# EAGLE board R2P_Sonar_module_mcu_only (EAGLE 6.2)
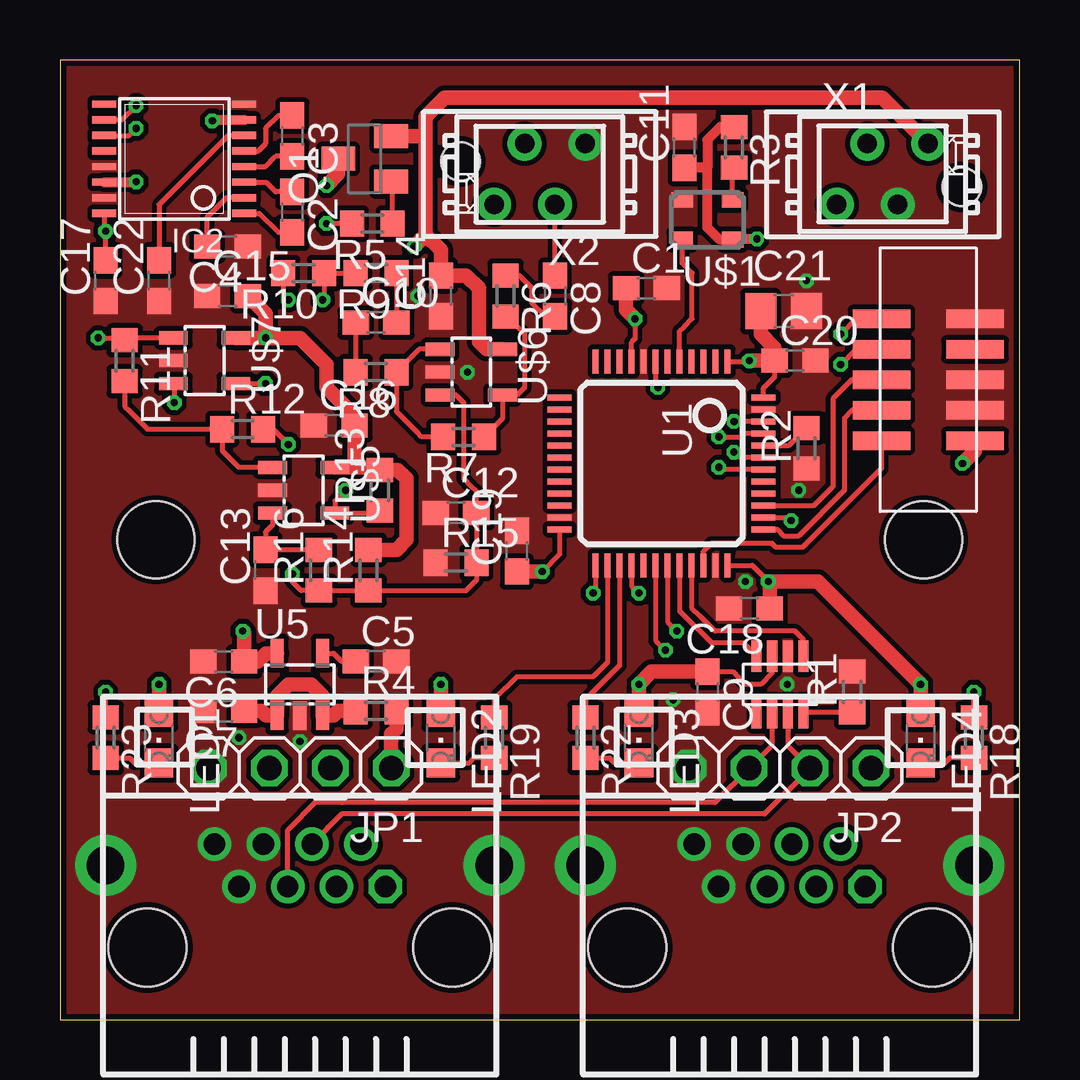
[diagram p0: board, top side]
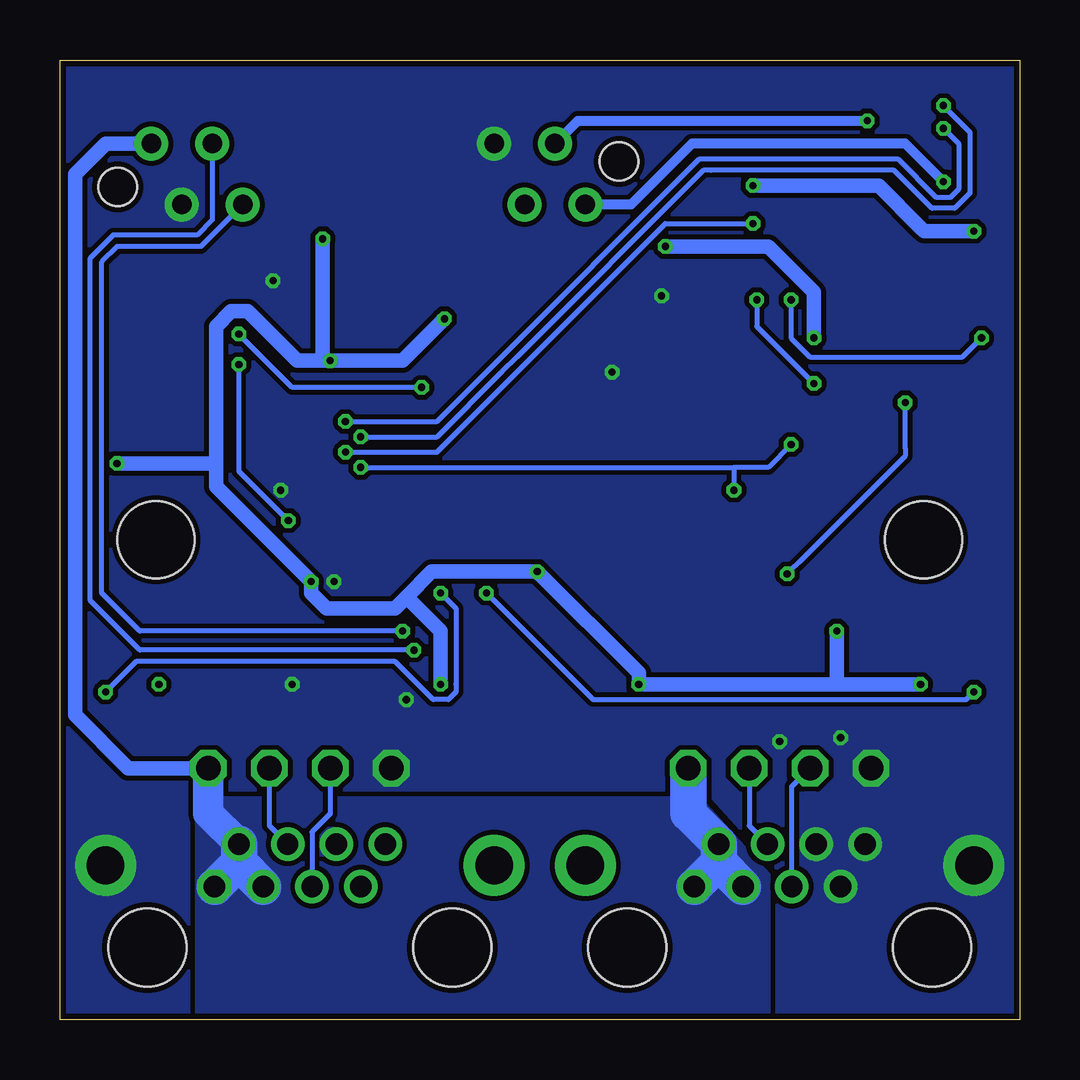
[diagram p1: board, bottom side, seen from below]

Size 40 x 40 mm. Coordinates in mm from the lower left corner, seen from the top.
Outline: 0,0 40,0 40,40 0,40 0,0
Copper layers (1*16): Top 0.035mm / dielectric 1.5mm / Bottom 0.035mm
Design rules: minimum track width 8mil, minimum drill 0.3mm, track to track 8mil, track to pad 8mil, pad to pad 8mil, via to via 8mil, smd to smd 0mil, copper to edge 10mil, drill to drill 10mil, minimum pad ring 10mil, minimum via ring 6mil, stop-mask expansion 2mil, vias tented up to drill 100mil, thermal gap 10mil
Holes 3.2 mm at 4,20 36,20

## Footprints (pad centres in the part's own frame; a part is rotated, then mirrored left to right if it is on the bottom)
0438600010 = drill 0.889 octagon: P$1 3.556,2.54 | drill 0.889: P$2 2.54,4.318; P$3 1.524,2.54; P$4 0.508,4.318; P$5 -0.508,2.54; P$6 -1.524,4.318; P$7 -2.54,2.54; P$8 -3.556,4.318 | drill 1.575 pad 2.54: P$9 8.103,3.429; P$10 -8.103,3.429 | hole 3.251: -6.35,0; 6.35,0
C0603 = smd 1.1 x 1: 1 -0.85,0; 2 0.85,0
C0805 = smd 1.3 x 1.5: 1 -0.95,0; 2 0.95,0
TSSOP16 = smd 0.305 x 0.991: 1 -2.275,-2.918; 2 -1.625,-2.918; 3 -0.975,-2.918; 4 -0.325,-2.918; 5 0.325,-2.918; 6 0.975,-2.918; 7 1.625,-2.918; 8 2.275,-2.918; 9 2.275,2.918; 10 1.625,2.918; 11 0.975,2.918; 12 0.325,2.918; 13 -0.325,2.918; 14 -0.975,2.918; 15 -1.625,2.918; 16 -2.275,2.918
1X04 = drill 1.016 octagon: 1 -3.81,0; 2 -1.27,0; 3 1.27,0; 4 3.81,0
CHIPLED_0805 = smd 1.2 x 1.2: A 0,-1.05; C 0,1.05
SOT23-BEC = smd 1 x 1.4: B -0.95,-1.1; C 0,1.1; E 0.95,-1.1
R0603 = smd 1 x 1.1: 1 -0.85,0; 2 0.85,0
SOT23-8L = smd 1.3 x 0.42: P$1 -1.175,1.3; P$2 -1.175,0.65; P$3 -1.175,0; P$4 -1.175,-0.65; P$5 1.175,-0.65; P$6 1.175,0; P$7 1.175,0.65; P$8 1.175,1.3
LQFP48 = smd 1 x 0.25: 1 -4.25,2.75; 2 -4.25,2.25; 3 -4.25,1.75; 4 -4.25,1.25; 5 -4.25,0.75; 6 -4.25,0.25; 7 -4.25,-0.25; 8 -4.25,-0.75; 9 -4.25,-1.25; 10 -4.25,-1.75; 11 -4.25,-2.25; 12 -4.25,-2.75; 25 4.25,-2.75; 26 4.25,-2.25; 27 4.25,-1.75; 28 4.25,-1.25; 29 4.25,-0.75; 30 4.25,-0.25; 31 4.25,0.25; 32 4.25,0.75; 33 4.25,1.25; 34 4.25,1.75; 35 4.25,2.25; 36 4.25,2.75 | smd 0.25 x 1: 13 -2.75,-4.25; 14 -2.25,-4.25; 15 -1.75,-4.25; 16 -1.25,-4.25; 17 -0.75,-4.25; 18 -0.25,-4.25; 19 0.25,-4.25; 20 0.75,-4.25; 21 1.25,-4.25; 22 1.75,-4.25; 23 2.25,-4.25; 24 2.75,-4.25; 37 2.75,4.25; 38 2.25,4.25; 39 1.75,4.25; 40 1.25,4.25; 41 0.75,4.25; 42 0.25,4.25; 43 -0.25,4.25; 44 -0.75,4.25; 45 -1.25,4.25; 46 -1.75,4.25; 47 -2.25,4.25; 48 -2.75,4.25
SOT23-5L = smd 0.55 x 1.2: 1 -0.95,-1.3; 2 0,-1.3; 3 0.95,-1.3; 4 0.95,1.3; 5 -0.95,1.3
ASE = smd 0.9 x 0.65: 1 -1.05,-0.825; 2 1.05,-0.825; 3 1.05,0.825; 4 -1.05,0.825
FTSH-105 = smd 0.76 x 2.4: P$1 -2.54,-1.95; P$2 -2.54,1.95; P$3 -1.27,-1.95; P$4 -1.27,1.95; P$5 0,-1.95; P$6 0,1.95; P$7 1.27,-1.95; P$8 1.27,1.95; P$9 2.54,-1.95; P$10 2.54,1.95
MICROMATCH-4 = drill 0.813 pad 1.422: 1 1.905,1.27; 2 0.635,-1.27; 3 -0.635,1.27; 4 -1.905,-1.27 | hole 1.6: 3.305,-0.53

## Placement (x,y rotation side)
1  RJ45-43860  [0438600010]  30,3 0 top
2  RJ45-43860  [0438600010]  10,3 0 top
C1  100n  [C0603]  24.45,30.48 0 top
C2  100n  [C0603]  9.68,33.66 270 top
C3  100n  [C0603]  9.68,36.83 270 top
C4  100n  [C0603]  6.99,32.23 180 top
C5  10n  [C0603]  13.18,14.92 0 top
C6  1u  [C0603]  6.83,14.92 180 top
C7  1u  [C0603]  6.83,12.86 180 top
C8  100n  [C0603]  20.64,30.16 270 top
C9  100n  [C0603]  26.99,13.65 270 top
C10  100n  [C0603]  13.18,29.05 0 top
C11  15pF  [C0603]  26.04,36.35 90 top
C12  100n  [C0603]  16.51,21.11 0 top
C13  100n  [C0603]  8.57,18.73 90 top
C14  100n  [C0603]  15.87,30.16 90 top
C15  100n  [C0603]  6.99,30.16 0 top
C16  100n  [C0603]  11.43,24.76 0 top
C17  100n  [C0603]  1.91,30.8 90 top
C18  100n  [C0603]  28.73,17.14 180 top
C19  100n  [C0603]  19.05,19.53 90 top
C20  100n  [C0603]  30.64,27.46 0 top
C21  4.7u  [C0805]  30.16,29.53 0 top
C22  100n  [C0603]  4.13,30.8 90 top
IC2  MAX3232CUE  [TSSOP16]  4.76,35.88 90 top
JP1  [1X04]  10,10.48 180 top
JP2  [1X04]  30,10.48 180 top
LED1  [CHIPLED_0805]  4.13,11.75 180 top
LED2  [CHIPLED_0805]  15.87,11.75 180 top
LED3  [CHIPLED_0805]  24.13,11.75 180 top
LED4  [CHIPLED_0805]  35.88,11.75 180 top
Q1  BC807-16SMD  [SOT23-BEC]  12.7,35.88 90 top
R1  0  [R0603]  33.02,13.65 90 top
R2  10k  [R0603]  31.12,23.81 90 top
R3  100k  [R0603]  28.1,36.35 270 top
R4  PTC  [R0603]  13.18,12.86 0 top
R5  10k  [R0603]  13.02,33.18 180 top
R6  2k2  [R0603]  18.57,30.16 270 top
R7  10k  [R0603]  16.83,24.29 180 top
R8  2k2  [R0603]  13.18,26.99 180 top
R9  2k2  [R0603]  13.18,31.11 180 top
R10  2k2  [R0603]  10.16,31.11 180 top
R11  2k2  [R0603]  2.7,27.46 270 top
R12  2k2  [R0603]  7.62,24.61 0 top
R13  2k2  [R0603]  13.33,22.07 90 top
R14  2k2  [R0603]  12.86,18.73 90 top
R15  2k2  [R0603]  16.51,19.05 0 top
R16  2k2  [R0603]  10.79,18.73 90 top
R18  330  [R0603]  38.1,11.75 270 top
R19  330  [R0603]  18.1,11.75 270 top
R22  330  [R0603]  21.91,11.75 270 top
R23  330  [R0603]  1.91,11.75 270 top
SOT1  MAX3051  [SOT23-8L]  29.69,13.97 270 top
U1  STM32F103CX  [LQFP48]  25.08,23.18 270 top
U5  LD3985XX  [SOT23-5L]  10,13.97 0 top
U$1  ASE  [ASE]  26.99,33.34 180 top
U$4  FTSH-105  [FTSH-105]  36.2,26.67 90 top
U$5  LMV331  [SOT23-5L]  10.16,22.07 270 top
U$6  TS461  [SOT23-5L]  17.14,26.99 270 top
U$7  TS461  [SOT23-5L]  6.03,27.46 270 top
X1  MICROMATCH-4  [MICROMATCH-4]  34.29,35.24 0 top
X2  MICROMATCH-4  [MICROMATCH-4]  20,35.24 180 top

## Library data of the parts
1 2 = molex
C1-C22 R1-R16 R18 R19 R22 R23 = rcl
IC2 = maxim; MF: MAXIM; MPN: MAX3232CUE+; OC_FARNELL: 1593350; OC_NEWARK: 68K4629
JP1 JP2 = misc
LED1-LED4 = led
Q1 = transistor-pnp
SOT1 = maxim
U1 U5 U$6 U$7 = st
U$1 = crystal; OC_FARNELL: unknown; OC_NEWARK: unknown
U$4 = samtec
U$5 = texas-instruments
X1 X2 = tyco

## Nets
!TXEN: R5.2 U1.43
+3V3: C1.1 C6.1 C9.1 C11.1 C18.1 C19.1 C20.1 C21.1 LED1.A LED2.A LED3.A LED4.A R3.1 SOT1.P$3 U1.1 U1.9 U1.24 U1.36 U1.48 U5.5 U$1.4 U$4.P$1
+5V: 1.P$1 1.P$2 1.P$3 2.P$1 2.P$2 2.P$3 C14.2 C15.2 C16.2 JP1.1 JP2.1 Q1.E R4.2 R13.2 R14.2 U$5.5 U$6.5 U$7.5 X1.1
BOOT0: R2.2 U1.44
CAN_RX: SOT1.P$4 U1.32
CAN_TX: SOT1.P$1 U1.33
CANH: 1.P$4 2.P$4 JP1.2 JP2.2 SOT1.P$7
CANL: 1.P$5 2.P$5 JP1.3 JP2.3 SOT1.P$6
GND: 1.P$6 1.P$7 1.P$8 1.P$9 1.P$10 2.P$6 2.P$7 2.P$8 2.P$9 2.P$10 C1.2 C4.1 C5.2 C6.2 C7.2 C9.2 C11.2 C12.1 C13.1 C14.1 C15.1 C16.1 C17.1 C18.2 C19.2 C20.2 C21.2 C22.1 IC2.8 IC2.13 IC2.15 JP1.4 JP2.4 R1.2 R2.1 R15.1 SOT1.P$2 U1.8 U1.23 U1.35 U1.47 U5.2 U$1.2 U$4.P$3 U$4.P$5 U$4.P$9 U$5.2 U$6.2 U$7.2 X1.2 X2.4
JTCK: U1.37 U$4.P$4
JTDI: U1.38 U$4.P$8
JTDO: U1.39 U$4.P$6
JTMS: U1.34 U$4.P$2
LED1: R23.1 U1.25
LED2: R19.1 U1.26
LED3: R22.1 U1.27
LED4: R18.1 U1.28
N$2: R1.1 SOT1.P$8
N$3: R3.2 U$1.1
N$4: C5.1 U5.4
N$5: C7.1 R4.1 U5.1 U5.3
N$6: C2.2 IC2.1
N$7: C2.1 IC2.3
N$8: C3.2 IC2.4
N$9: C3.1 IC2.5
N$10: C17.2 IC2.16 Q1.C
N$11: C8.2 R6.1
N$15: LED4.C R18.2
N$17: Q1.B R5.1
N$18: LED2.C R19.2
N$20: LED3.C R22.2
N$21: R6.2 R7.1 U$6.4
N$22: LED1.C R23.2
N$23: R7.2 R8.1 U$6.1
N$24: C10.1 R8.2
N$25: C10.2 R9.1
N$26: R9.2 R10.1 U$7.4
N$27: R10.2 R11.1 U$7.1
N$28: R11.2 R12.1 U$5.1
N$29: C4.2 IC2.2
N$30: C13.2 R16.2 U$5.3
N$31: C22.2 IC2.6
NRST: U1.7 U$4.P$10
OSC_IN: U1.5 U$1.3
OSC_OUT: U1.6
RX1: R12.2 R13.1 U1.42 U$5.4
TX1: IC2.11 U1.46
TX2: IC2.10 U1.45
UART_RX: U1.31 X1.4
UART_TX: U1.30 X1.3
URX1: C8.1 X2.3
UTX1: IC2.14 X2.1
UTX2: IC2.7 X2.2
VREF: C12.2 R14.1 R15.2 R16.1 U$6.3 U$7.3

## Tracks (layer width: path | path; a pad name or v marks a point on that pad's centre or on a via)
!TXEN  (via drill 0.3)
  Top 0.203: R5.2 v11.11,33.18 | U1.43 28.32,23.43 v28.1,23.65
  Bottom 0.203: v11.11,33.18 14.76,33.18 20.96,26.99 24.29,23.65 v28.1,23.65
+3V3  (via drill 0.3)
  Top 0.203: SOT1.P$3 29.69,14.45 29.21,13.97 28.57,13.97 28.26,14.29 28.04,14.5 C9.1 | 8.6,15.27 8.57,15.24 | U1.24 20.83,19.4 v20.1,18.68 | U1.36 28.86,18.93 v29.53,18.26 | v23.97,29.21 23.97,28.42 23.97,28.38 23.83,28.24 U1.9 | U1.1 28.7,27.43 v28.73,27.46 | U1.48 29.33,26.32 29.79,26.77 C20.1
  Top 0.406: 26.99,35.5 26.99,33.02 27.49,32.51 U$1.4 28.07,32.54 v29.05,32.54 | 26.99,35.5 C11.1 | R3.1 27.52,37.2 26.99,36.67 26.99,35.5
  Top 0.61: U5.5 8.6,15.27 | 8.57,15.24 8.25,14.92 C6.1 7.68,16.14 v7.62,16.19 | LED1.A v4.13,13.97 | LED2.A v15.87,13.97 | LED3.A v24.13,13.97 24.66,14.5 C9.1 | LED4.A v35.88,13.97 31.59,18.26 v29.53,18.26 29.58,18.26 C18.1 | C1.1 23.6,29.58 v23.97,29.21 | C19.1 v20.1,18.68 | v37.62,23.18 38.14,23.7 38.14,24.02 U$4.P$1 | v28.73,27.46 C20.1 29.79,28 29.21,28.57 C21.1
  Bottom 0.61: 7.62,13.97 v7.62,16.19 | v4.13,13.97 7.62,13.97 | 7.62,13.97 v15.87,13.97 15.87,14.45 v20.1,18.68 24.5,18.68 25.56,17.62 | 33.5,23.18 33.5,22.22 v29.53,18.26 29.53,17.78 28.89,17.14 26.03,17.14 25.56,17.62 | 33.5,23.18 33.5,28.89 32.86,29.53 32.7,29.53 32.17,29.53 30.11,27.46 v28.73,27.46 | v37.62,23.18 33.5,23.18 | v24.13,13.97 24.13,16.19 25.56,17.62 | v28.73,27.46 25.72,27.46 v23.97,29.21 | v29.05,32.54 29.05,27.46 v28.73,27.46
+5V  (via drill 0.3)
  Top 0.203: 13.24,23.02 R13.2
  Top 0.61: R4.2 14.03,12.12 13.81,11.9 JP1.1 | X1.1 34.29,38.42 16.03,38.42 15.24,37.63 15.24,37.47 15.24,36.83 | U$6.5 17.78,27.94 17.46,28.26 17.46,30.48 16.93,31.01 C14.2 15.87,32.07 15.24,32.7 | 13.24,23.02 12.38,23.02 12.07,23.02 | 12.07,23.02 U$5.5 | R13.2 14.07,22.92 14.45,22.54 14.45,20 14.03,19.58 R14.2 | Q1.E 15.24,36.83 | U$7.5 v8.57,28.41 v8.57,28.42 | C15.2 8.57,29.42 v8.57,28.42 | 15.24,36.83 15.24,32.7 | 15.24,32.7 v14.76,32.23 | v8.57,28.42 10,28.42 11.11,27.3 11.11,26.35 11.75,25.72 12.28,25.18 C16.2 12.28,23.02 12.07,23.02
  Bottom 0.61: JP2.1 37.15,10.48 39.37,12.7 39.37,35.24 38.1,36.51 X1.1 | v14.76,32.23 10.48,32.23 8.57,30.32 v8.57,28.42
  Bottom 1.27: JP2.1 33.81,8.59 1.P$2
  Bottom 1.524: JP1.1 13.81,8.59 2.P$2 12.54,6.56 | 12.54,6.56 2.P$1 | 2.P$3 12.54,6.56 | 1.P$1 32.54,6.56 | 1.P$3 32.54,6.56 | 32.54,6.56 1.P$2
  pour Bottom (no thermals): 10.48,0 10.48,6.03 13.33,9.21 34.29,9.21 34.29,0
BOOT0
  Top 0.203: U1.44 30.38,23.93 R2.2
CAN_RX
  Top 0.203: U1.32 25.83,17.03 27.15,15.72 28.46,15.72 SOT1.P$4
CAN_TX
  Top 0.203: U1.33 26.33,17.16 26.67,16.83 27.3,16.19 30.64,16.19 30.99,15.85 SOT1.P$1
CANH
  Top 0.203: 2.P$4 10.51,7.33 11.75,8.57 29.37,8.57 JP2.2 30.34,11.42 SOT1.P$7
  Bottom 0.203: JP1.2 11.27,8.08 2.P$4 | JP2.2 31.27,8.08 1.P$4
CANL
  Top 0.203: SOT1.P$6 29.69,11.43 JP2.3 27.3,9.05 11.75,9.05 10.64,9.05 9.52,7.94 9.49,7.9 2.P$5
  Bottom 0.203: 1.P$5 29.49,7.81 28.73,8.57 JP2.3 | 2.P$5 9.49,9.72 JP1.3
GND  (via drill 0.3)
  other vias: 30.8,22.07 30.32,13.97 10,11.59 7.46,11.75 31.12,30.8 28.57,18.26 25.56,13.34 16.99,26.99 14.92,30.16
  pour Bottom (rank 6, no thermals): 0,0 40,0 40,40 0,40
  pour Top (rank 6, no thermals): 0,0 40,0 40,40 0,40
JTCK
  Top 0.203: U1.37 29.9,20.43 30.16,20.16 30.8,20.16 32.7,22.07 32.7,25.08 33.02,25.4 33.18,25.4 U$4.P$4
JTDI  (via drill 0.3)
  Top 0.203: U$4.P$8 33.18,27.94 v32.54,27.3 | U1.38 30.35,20.93 v30.48,20.8
  Bottom 0.203: v32.54,27.3 32.54,22.86 v30.48,20.8
JTDO
  Top 0.203: U$4.P$6 33.02,26.67 32.23,25.88 32.23,22.22 31.43,21.43 U1.39
JTMS
  Top 0.203: U1.34 26.83,19.53 27.15,19.84 29.69,19.84 29.85,19.68 30.96,19.68 34.24,22.97 U$4.P$2
LED1  (via drill 0.3)
  Top 0.203: U1.25 22.33,17.89 v22.23,17.78 | R23.1 v1.91,13.65
  Bottom 0.203: v22.23,17.78 17.78,13.34 2.54,13.34 2.22,13.34 v1.91,13.65
LED2
  Top 0.203: U1.26 22.83,14.89 22.23,14.29 19.05,14.29 18.1,13.34 R19.1
LED3
  Top 0.203: U1.27 23.33,14.76 21.91,13.34 R22.1
LED4  (via drill 0.3)
  Top 0.203: U1.28 23.83,18.08 v24.13,17.78 | R18.1 v38.1,13.65
  Bottom 0.203: v24.13,17.78 23.49,17.14 23.49,13.97 23.49,13.65 23.81,13.34 24.45,13.34 24.76,13.65 26.03,14.92 36.83,14.92 v38.1,13.65
N$2
  Top 0.203: R1.1 SOT1.P$8
N$3
  Top 0.203: U$1.1 28.04,35.6 R3.2
N$4
  Top 0.203: U5.4 11.4,15.27 11.43,15.24 11.75,14.92 C5.1
N$5
  Top 0.203: 8.6,12.67 8.57,12.7 | 11.4,12.67 11.43,12.7
  Top 0.61: 8.6,12.67 U5.1 9.05,13.5 9.52,13.97 10.48,13.97 10.95,13.5 U5.3 11.4,12.67 | C7.1 8.41,12.86 8.57,12.7 | R4.1 11.59,12.86 11.43,12.7
N$6
  Top 0.203: IC2.1 8.31,33.6 9.1,32.8 C2.2
N$7
  Top 0.203: IC2.3 8.59,34.9 8.99,34.51 C2.1
N$8
  Top 0.203: IC2.4 8.57,35.55 8.99,35.98 C3.2
N$9
  Top 0.203: C3.1 9.1,37.68 8.57,37.15 8.57,36.51 8.25,36.2 IC2.5
N$10  (via drill 0.3)
  Top 0.203: IC2.16 1.84,32.92 v1.91,32.86 C17.2
  Top 0.61: Q1.C 11.6,35.25 v11.11,34.77
  Bottom 0.61: v11.11,34.77 5.87,34.77 4.13,33.02 3.97,32.86 v1.91,32.86
N$11
  Top 0.203: R6.1 19.15,31.01 19.69,30.48 19.69,29.84 20.22,29.31 C8.2
N$15
  Top 0.203: LED4.C 36.89,10.7 37.09,10.9 R18.2
N$17
  Top 0.203: R5.1 13.87,34.86 Q1.B
N$18
  Top 0.203: LED2.C 17.05,10.7 17.25,10.9 R19.2
N$20
  Top 0.203: R22.2 22.92,10.9 23.12,10.7 LED3.C
N$21
  Top 0.203: R7.1 18.44,25.06 U$6.4 19.05,26.04 19.37,26.35 19.37,28.57 18.63,29.31 R6.2
N$22
  Top 0.203: LED1.C 3.11,10.7 2.91,10.9 R23.2
N$23
  Top 0.203: U$6.1 14.98,27.94 R8.1 14.03,26.61 14.03,25.34 14.92,24.45 15.08,24.29 R7.2
N$24
  Top 0.203: C10.1 R8.2
N$25
  Top 0.203: R9.1 C10.2
N$26  (via drill 0.3)
  Top 0.203: R9.2 R10.1 11.01,30.06 v10.95,30 | U$7.4 v8.57,26.51
  Bottom 0.203: v10.95,30 10.95,28.89 v8.57,26.51
N$27  (via drill 0.3)
  Top 0.203: U$7.1 2.8,28.41 R11.1 2.6,28.42 v1.59,28.42 | R10.2 9.31,30.22 v9.52,30
  Bottom 0.203: v9.52,30 9.52,28.42 8.73,27.62 2.38,27.62 v1.59,28.42
N$28
  Top 0.203: R11.2 2.7,25.56 2.86,25.4 3.65,24.61 R12.1 6.77,23.71 6.99,23.49 7.46,23.02 U$5.1
N$29
  Top 0.203: IC2.2 6.95,34.25 6.35,33.66 6.13,33.44 C4.2
N$30
  Top 0.203: R16.2 C13.2 8.57,20.32 8.86,20.61 U$5.3
N$31
  Top 0.203: IC2.6 7.01,36.85 4.13,33.97 C22.2
NRST  (via drill 0.3)
  Top 0.203: U1.7 24.83,26.44 v24.92,26.35 | U$4.P$10 33.18,29.21 v32.54,28.57
  Bottom 0.203: v24.92,26.35 30.32,26.35 v32.54,28.57
OSC_IN
  Top 0.203: U1.5 25.83,28.69 26.03,28.89 26.35,29.21 26.35,31.11 25.94,31.53 U$1.3
RX1  (via drill 0.3)
  Top 0.203: R13.1 13.24,21.12 U$5.4 11.46,21.62 v11.91,22.07 | U1.42 27.55,22.93 v27.46,23.02 | R12.2 8.89,24.61 v9.52,23.97
  Bottom 0.203: v27.46,23.02 11.91,23.02 | 11.91,23.02 v11.91,22.07 | v9.52,23.97 10.48,23.02 11.91,23.02
TX1  (via drill 0.3)
  Top 0.203: IC2.11 2.88,36.85 v3.18,37.15 | U1.46 v28.1,24.93
  Bottom 0.203: v3.18,37.15 2.54,36.51 2.54,34.61 2.86,34.29 3.49,34.29 5.08,35.88 13.33,35.88 22.23,26.99 24.28,24.93 v28.1,24.93
TX2  (via drill 0.3)
  Top 0.203: IC2.10 2.58,37.5 v3.18,38.1 | v27.46,24.29 28.42,24.29 28.55,24.43 U1.45
  Bottom 0.203: v3.18,38.1 2.06,36.99 2.06,34.45 2.7,33.81 3.65,33.81 5.24,35.4 12.86,35.4 13.18,35.4 20.96,27.62 21.59,26.99 24.29,24.29 v27.46,24.29
UART_RX  (via drill 0.3)
  Top 0.203: U1.31 25.33,16.58 v25.72,16.19
  Bottom 0.203: v25.72,16.19 36.67,16.19 38.26,17.78 38.26,31.59 37.62,32.23 34.13,32.23 X1.4
UART_TX  (via drill 0.3)
  Top 0.203: U1.30 24.83,16.12 24.83,15.81 v25.24,15.4
  Bottom 0.203: v25.24,15.4 36.67,15.4 38.74,17.46 38.74,31.75 37.78,32.7 34.29,32.7 33.65,33.34 X1.3
URX1
  Top 0.203: C8.1 X2.3
UTX1  (via drill 0.3)
  Top 0.406: IC2.14 3.15,34.9 v3.18,34.93
  Bottom 0.406: v3.18,34.93 4.76,36.51 13.65,36.51 16.19,33.97 X2.1
UTX2  (via drill 0.3)
  Top 0.406: v6.35,37.47 6.39,37.5 IC2.7
  Bottom 0.406: X2.2 18.41,37.47 v6.35,37.47
VREF  (via drill 0.3)
  Top 0.203: v9.68,18.57 9.68,18.26 10.06,17.88 R16.1 R14.1 16.93,17.88 17.14,18.1 17.36,18.31 R15.2 C12.2 17.36,22.01 17.14,22.22 16.83,22.54 16.83,25.72 16.51,26.04 U$6.3 | U$7.3 4.76,26.48 v4.76,25.72
  Bottom 0.203: v4.76,25.72 4.76,23.81 4.76,23.49 9.21,19.05 9.52,18.73 v9.68,18.57